# Altium PCB iSensor.PcbDoc
Units mm, origin at the board's own origin, x right, y up, seen from the top; angles counter-clockwise.
Board outline 152.4 x 101.6 mm, 2 copper layers (Top Layer, Bottom Layer); 9 components, 11 nets, 62 pads, 17 vias.
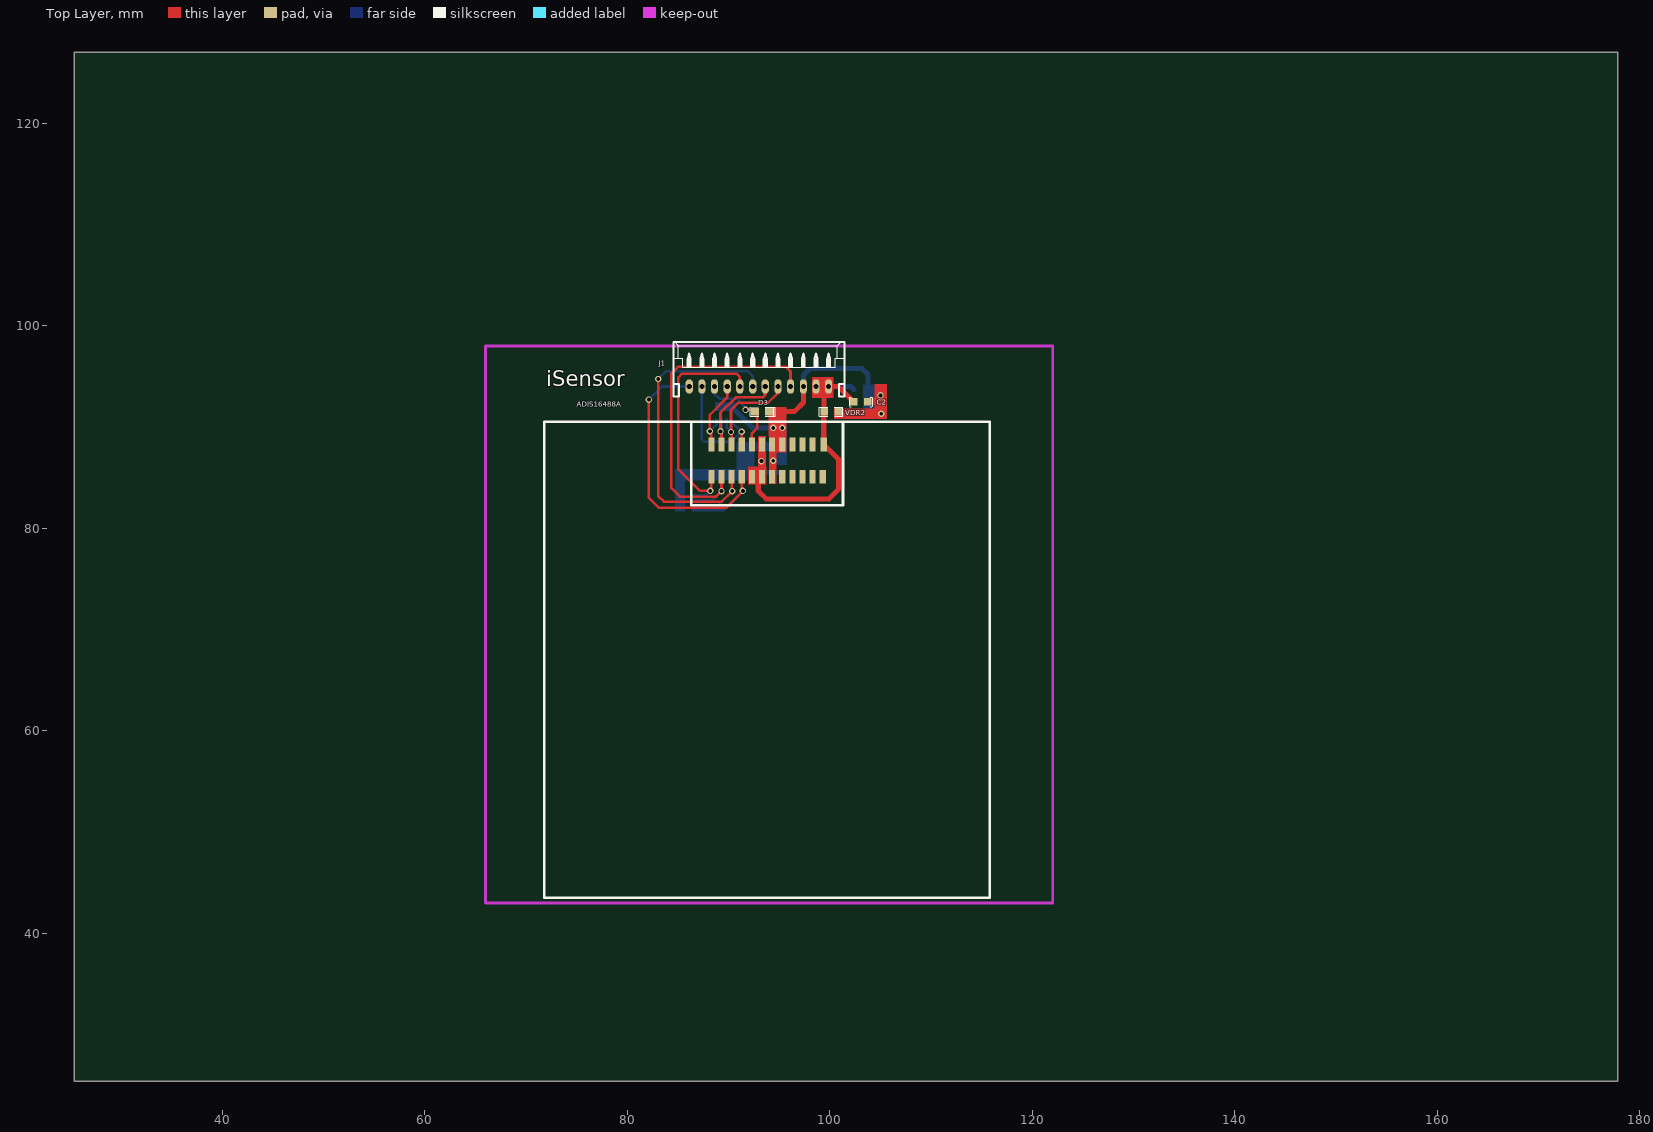
[diagram p0: Top Layer view]
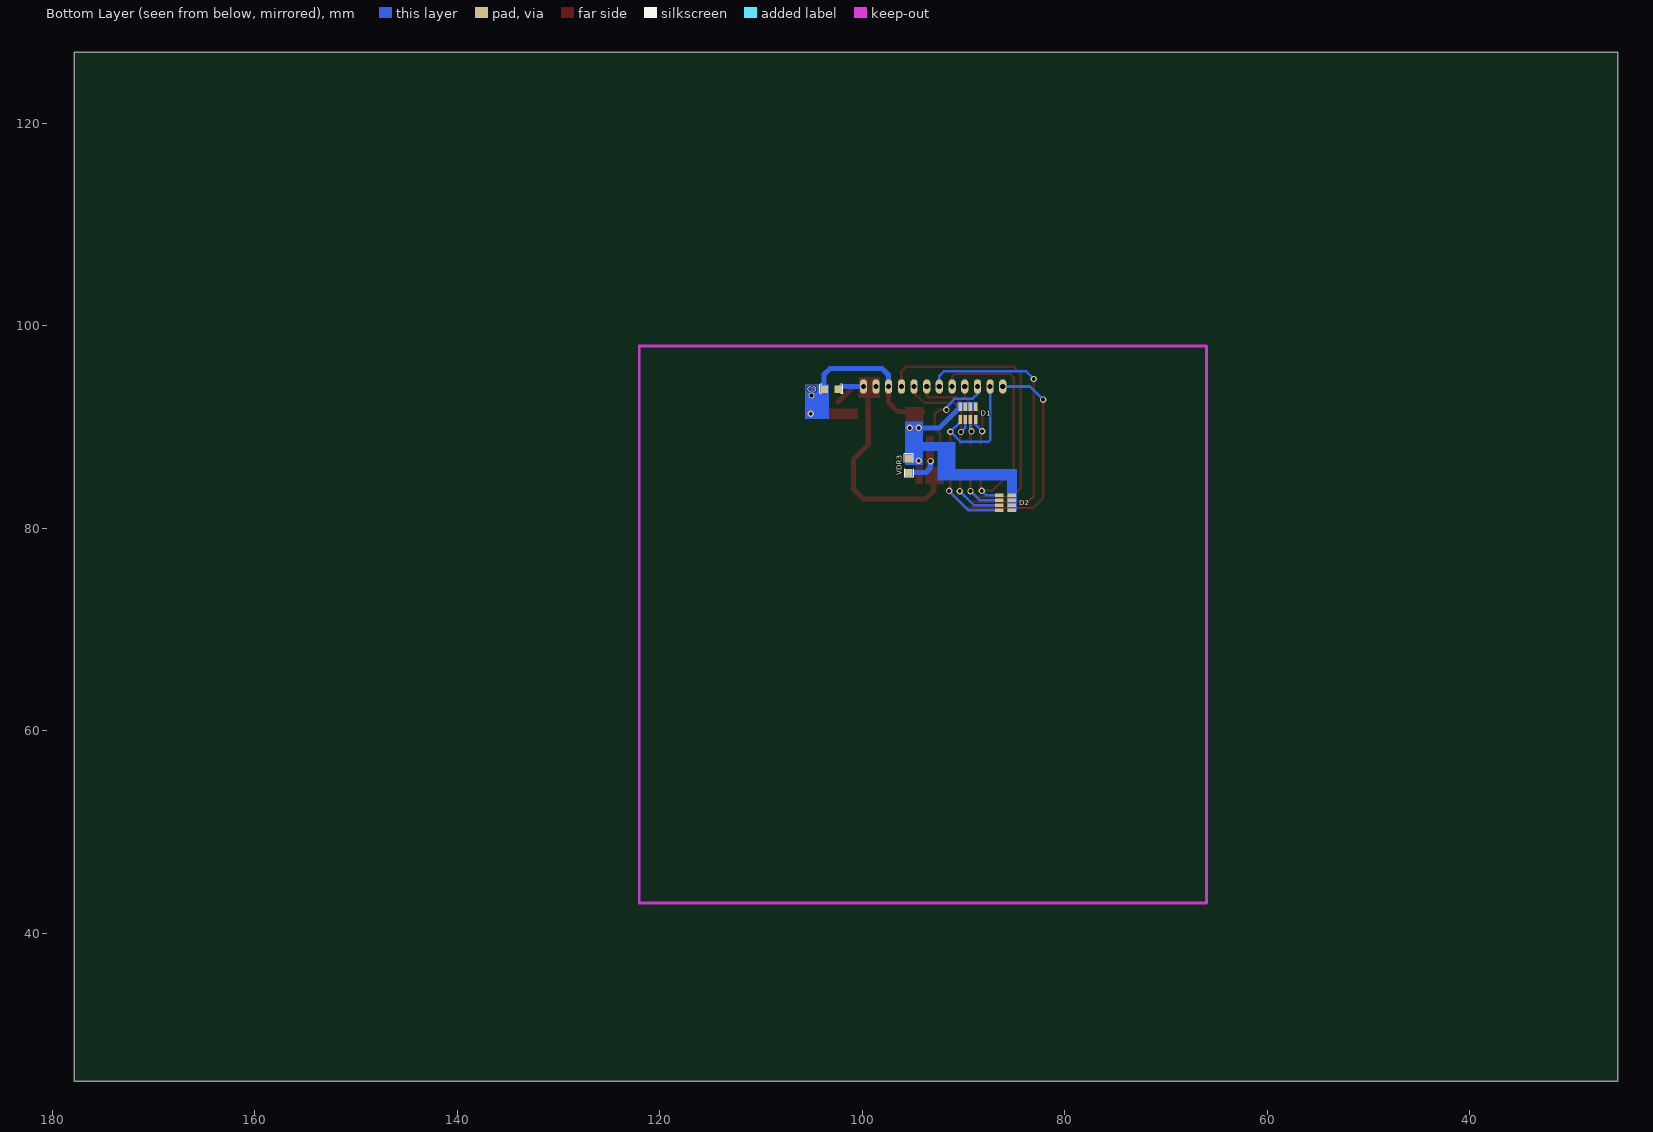
[diagram p1: Bottom Layer view, seen from below]

## Layer stack, top to bottom
Top Solder: solder mask 0.0102, Solder Resist, Dk 3.5
Top Layer: signal copper 0.0356
Dielectric 1: dielectric 0.32, FR-4, Dk 4.8
Bottom Layer: signal copper 0.0356
Bottom Solder: solder mask 0.0102, Solder Resist, Dk 3.5

## Board outline
25.4,25.4 177.8,25.4 177.8,127 25.4,127

## Design rules (kind name [scope] priority, off if disabled: settings)
Clearance [All] p1: gap=0
HoleSize [All] p1: absolutevalues=TRUE maxlimit=12.7 minlimit=0.025 maxpercent=80.000 minpercent=20.000
HoleToHoleClearance [All] p1: gap=0 allowstackedmicrovias=TRUE
MinimumSolderMaskSliver [All] p1: minsoldermaskwidth=0
PolygonConnect [All] p1: connectstyle=Relief reliefconductorwidth=0.254 reliefentries=4 polygonreliefangle="90 Angle" airgapwidth=0.254
RoutingVias [All] p1: holewidth=0.381 width=0.635 viastyle="Through Hole" minholewidth=0.051 minwidth=0.127 maxholewidth=0.762 maxwidth=1.27
SilkToSilkClearance [All] p1: silktosilkclearance=0
SilkToSolderMaskClearance [IsPad] p1: minsilkscreentomaskgap=0 clearancetoexposedcopper=TRUE
SolderMaskExpansion [All] p1: expansion=0.102
UnpouredPolygon [All] p1: allowunpoured=FALSE
Width [All] p1: maxlimit=1.27 minlimit=0.025 preferedwidth=0.254
24 further rules are at their usual default settings.

## Components (designator, comment, footprint, x,y, rotation, side; value= is the part's Value field where it differs from the comment)
ADIS16488A "iSensor-10" iSensor 93.853,86.685 r0 top locked
C2 "0.1uF" 0603C 103.759,92.481 r180 top
C3 "10uF" 0603C 103.759,93.726 r180 bottom
D1 "82380050100" 82380050100 89.56,91.364 r180 bottom
D2 "82380050100" 82380050100 85.852,82.525 r90 bottom
D3 "82306050029" 0603D 92.608,91.516 r0 top
J1 "HEAD2X6" 53048-12 93,94 r0 top locked
VDR2 "82536040" 0603R 100.838,91.516 r180 top
VDR3 "82536040" 0603R 95.402,86.893 r270 bottom

## Footprints (in the part's own frame and the unit in brackets; to place one, negate y for a bottom-side part, rotate by r counter-clockwise, add the part's x,y. Pads: shape width x height; smd on the part's side, far side on the other; paste and mask are expansions set on the pad)
0603C [mil]
  rect 30x30 smd: 1(0,0) 2(55,0)
  silkscreen extent -19,-18 73,19
0603D [mil]
  rect 30x30 smd: 1(0,0) 2(55,0)
  silkscreen extent -18,-18 79,18
0603R [mil]
  rect 30x30 smd: 1(0,0) 2(55,0)
  silkscreen extent -18,-18 73,18
53048-12 [mil] "1.25"
  oval 28x56 hole 20: 1(270.93,0) 2(221.93,0) 3(172.93,0) 4(122.93,0) 5(73.93,0) 6(24.93,0) 7(-24.07,0) 8(-74.07,0) 9(-123.29,0) 10(-172.5,0) 11(-221.71,0) 12(-270.93,0)
  silkscreen extent -332,-39 332,173
82380050100 [mm]
  rect 0.35x0.85 smd: 1(-0.75,0.625) 2(-0.75,-0.625) 3(-0.25,0.625) 4(-0.25,-0.625) 5(0.25,0.625) 6(0.25,-0.625) 7(0.75,0.625) 8(0.75,-0.625)
iSensor [mil]
  rect 24x54 smd: 1(-218.35,63.03) 2(-218.35,-63.03) 3(-178.98,63.03) 4(-178.98,-63.03) 5(-139.61,63.03) 6(-139.61,-63.03) 7(-100.24,63.03) 8(-100.24,-63.03) 9(-60.87,63.03) 10(-60.87,-63.03) 11(-21.5,63.03) 12(-21.5,-63.03) 13(17.87,63.03) 14(17.87,-63.03) 15(57.24,63.03) 16(57.24,-63.03) 17(96.61,63.03) 18(96.61,-63.03) 19(135.98,63.03) 20(135.98,-63.03) 21(175.35,63.03) 22(175.35,-63.03) 23(218.35,63.03) 24(214.72,-63.03)
  silkscreen extent -868,-1699 864,151

## Part data
C2 C3: library part C
D1 D2: library part DIODE-TVS/Array
D3: library part DIODE-TVS/Bidirectional
VDR2 VDR3: library part Varistor

## Via types
v1: diameter 0.635, hole 0.381, Top Layer to Bottom Layer, 17 vias

## Nets (pads, with @x,y where several pads share a name; then routed paths per layer and width w, separated by ;. In a path a pad name is that pad's centre, name@x,y a point inside that pad or via, vN(x,y) a via of type N, cw(c..) or ccw(c..) an arc to the next point about the centre after c; other vN are vias at no path point)
C\S\: ADIS16488A.6 D2.3 J1.7 | length 36.3
  Top Layer w0.254: v1(83.058,94.742) 83.058,83.185 83.617,82.626 89.332,82.626 v1(90.373,83.668) 90.307,83.734 ADIS16488A.6
  Bottom Layer w0.254: v1(83.058,94.742) 83.82,95.504 91.923,95.504 92.389,95.038 J1.7 ; D2.3 88.98,82.275 v1(90.373,83.668)
DIN: ADIS16488A.5 D1.4 J1.5 | length 10.8
  Top Layer w0.254: ADIS16488A.5 90.307,89.449 v1(90.246,89.51) 90.246,91.669 90.977,92.4 91.873,92.4 93.924,92.4 94.878,93.354 J1.5
  Bottom Layer w0.254: D1.4 89.81,89.945 v1(90.246,89.51)
DIO1: ADIS16488A.7 D1.2 J1.11 | length 12.5
  Top Layer w0.254: v1(91.288,89.535) 91.307,89.516 ADIS16488A.7
  Bottom Layer w0.254: J1.11 87.369,88.73 87.554,88.544 90.297,88.544 v1(91.288,89.535) 90.31,90.512 D1.2
DIO2: ADIS16488A.9 D3.1 J1.10 | length 9.2
  Top Layer w0.254: v1(91.694,91.694) 92.38,91.694 92.583,91.491 D3.1 92.837,91.288 92.837,89.891 92.307,89.361 ADIS16488A.9
  Bottom Layer w0.254: J1.10 88.619,93.271 89.095,92.795 90.847,92.795 91.694,91.948 v1(91.694,91.694)
DIO3: ADIS16488A.1 D1.8 J1.9 | length 7.9
  Top Layer w0.254: ADIS16488A.1 88.307,89.442 v1(88.163,89.586) 88.163,91.211 89.865,92.913 89.865,93.997 J1.9
  Bottom Layer w0.254: v1(88.163,89.586) 88.81,90.233 D1.8
DIO4: ADIS16488A.2 D2.7 J1.8 | length 23.7
  Top Layer w0.254: ADIS16488A.2 88.307,83.811 v1(88.189,83.693) 87.173,83.693 85.039,85.827 85.039,94.894 85.42,95.275 90.78,95.275 91.119,94.936 J1.8
  Bottom Layer w0.254: D2.7 87.77,83.275 v1(88.189,83.693)
DOUT: ADIS16488A.4 D2.5 J1.4 | length 35.2
  Top Layer w0.254: ADIS16488A.4 v1(89.306,83.668) 88.773,83.134 85.192,83.134 84.353,83.972 84.353,95.301 84.988,95.936 95.682,95.936 96.122,95.495 J1.4
  Bottom Layer w0.254: D2.5 88.413,82.775 v1(89.306,83.668)
GND: ADIS16488A.13 ADIS16488A.14 ADIS16488A.15 C2.1 C3.1 D1.1 D1.3 D1.5 D1.7 D2.2 D2.4 D2.6 D2.8 D3.2 J1.3 VDR2.1 VDR3.1 | length 23.3
  Top Layer w0.508: D3.2 96.495,91.516 97.409,92.431 97.409,93.983 J1.3 ; C2.1 104.369,92.481 v1(105.004,93.116)
  Bottom Layer w0.508: D1.1 92.383,89.916 v1(94.412,89.916) v1(95.301,89.916) ; v1(94.412,86.665) 95.174,86.665 VDR3.1 ; J1.3 97.392,95.132 98.044,95.783 103.149,95.783 103.759,95.174 C3.1
  other v1: 105.08,91.313
R\S\T\: ADIS16488A.8 D2.1 J1.12 | length 32
  Top Layer w0.254: v1@82.144,92.888 v1(82.144,92.71) 82.118,92.685 82.118,83.033 83.134,82.017 89.738,82.017 v1(91.415,83.693) 91.307,83.801 ADIS16488A.8
  Bottom Layer w0.254: v1(82.144,92.71) 83.434,94 J1.12 ; D2.1 89.496,81.775 v1(91.415,83.693)
SCLK: ADIS16488A.3 D1.6 J1.6 | length 10.4
  Top Layer w0.254: ADIS16488A.3 89.307,89.458 v1(89.205,89.56) 89.205,91.415 90.721,92.931 93.388,92.931 93.599,93.142 93.599,93.966 J1.6
  Bottom Layer w0.254: v1(89.205,89.56) 89.31,89.666 D1.6
VDD: ADIS16488A.10 ADIS16488A.11 ADIS16488A.12 ADIS16488A.23 C2.2 C3.2 J1.1 J1.2 VDR2.2 VDR3.2 | length 29.9
  Top Layer w0.508: 92.939,85.217 92.939,83.693 93.726,82.906 99.924,82.906 100.863,83.845 100.863,86.822 ADIS16488A.23 99.399,91.474 VDR2.2 99.441,93.559 J1.1 100.843,94 C2.2
  Bottom Layer w0.508: v1(93.243,86.639) 93.243,85.954 93.701,85.496 VDR3.2 ; J1.1 102.088,94 C3.2
pads on no net: ADIS16488A.16 ADIS16488A.17 ADIS16488A.18 ADIS16488A.19 ADIS16488A.20 ADIS16488A.21 ADIS16488A.22 ADIS16488A.24

## Keep-outs
Keep-Out Layer:
  lines w0.254: 66,43 122,43 122,98 66,98 66,43

## Other copper
Top Layer:
  rectangle net GND: 104.394,91.821 105.664,94.234
  rectangle net GND: 100.432,90.805 105.664,91.846
  rectangle net VDD: 98.247,92.888 100.355,94.92
  rectangle net GND: 93.955,89.052 95.707,91.999
  rectangle net GND: 94.615,87.478 95.707,89.052
  rectangle net GND: 94.005,84.353 94.742,89.052
  rectangle net VDD: 92.913,86.081 93.701,89.103
  rectangle net VDD: 91.923,84.328 93.726,86.081
Bottom Layer:
  rectangle net GND: 103.302,90.805 105.639,94.209
  rectangle net GND: 84.709,81.661 85.725,85.852
  rectangle net GND: 85.725,84.709 92.583,85.852
  rectangle net GND: 90.805,85.852 92.583,88.519
  rectangle net GND: 92.583,87.63 95.758,88.519
  rectangle net GND: 93.98,86.233 95.758,90.551
  rectangle net GND: 88.646,91.567 90.678,92.456

## Silkscreen, mask and mechanical layers (free items; w line width, h text height)
Top Overlay:
  text "iSensor" at 72,94 h1.52
Mechanical 1:
  circle w0.254: c119,95 r1.6
  circle w0.254: c69,95 r1.6
  circle w0.254: c69,46 r1.6
  circle w0.254: c119,46 r1.6
  lines w0.254: 95.91,86.7 98.45,86.66 ; 96.918,86.176 98.45,86.66 ; 96.934,87.192 98.45,86.66 ; 98.446,86.406 98.454,86.914 ; 99.086,86.396 99.094,86.904 ; 100.606,86.118 99.09,86.65 ; 100.622,87.134 99.09,86.65 ; 101.63,86.61 99.09,86.65 ; 109.56,88.4 112.1,88.4 ; 110.576,87.892 112.1,88.4 ; 110.576,88.908 112.1,88.4 ; 112.1,88.146 112.1,88.654 ; 114.859,94.92 117.399,94.92 ; 115.1,88.146 115.1,88.654 ; 115.875,94.412 117.399,94.92 ; 115.875,95.428 117.399,94.92 ; 116.624,87.892 115.1,88.4 ; 116.624,88.908 115.1,88.4 ; 117.399,94.666 117.399,95.174 ; 117.64,88.4 115.1,88.4 ; 120.599,94.666 120.599,95.174 ; 122.123,94.412 120.599,94.92 ; 122.123,95.428 120.599,94.92 ; 123.139,94.92 120.599,94.92 ; 66,43 122,43 122,98 66,98 66,43 ; 70.358,54.077 79.435,45 108.398,45 117.45,54.051 117.45,81.01 70.358,81.01 70.358,54.077
  text "3.2 (mm)" at 113.515,91.263 h1.52
  text "3 (mm)" at 109.512,84.743 h1.52
  text "0.64 (mm)" at 92.467,83.096 h1.52 r359.1

## Dimensions
66,98 to 122,98 on Mechanical 1
122,98 to 122,43 on Mechanical 1